# Altium PCB PCI short card universal - 32 BIT.PCBDOC (part 2 of 4)
Units mm, origin at the board's own origin, x right, y up, seen from the top; angles counter-clockwise.
Board outline 174.62 x 106.68 mm, 4 copper layers (TopLayer, MidLayer2, MidLayer3, BottomLayer); 200 components, 306 nets, 1120 pads, 510 vias.
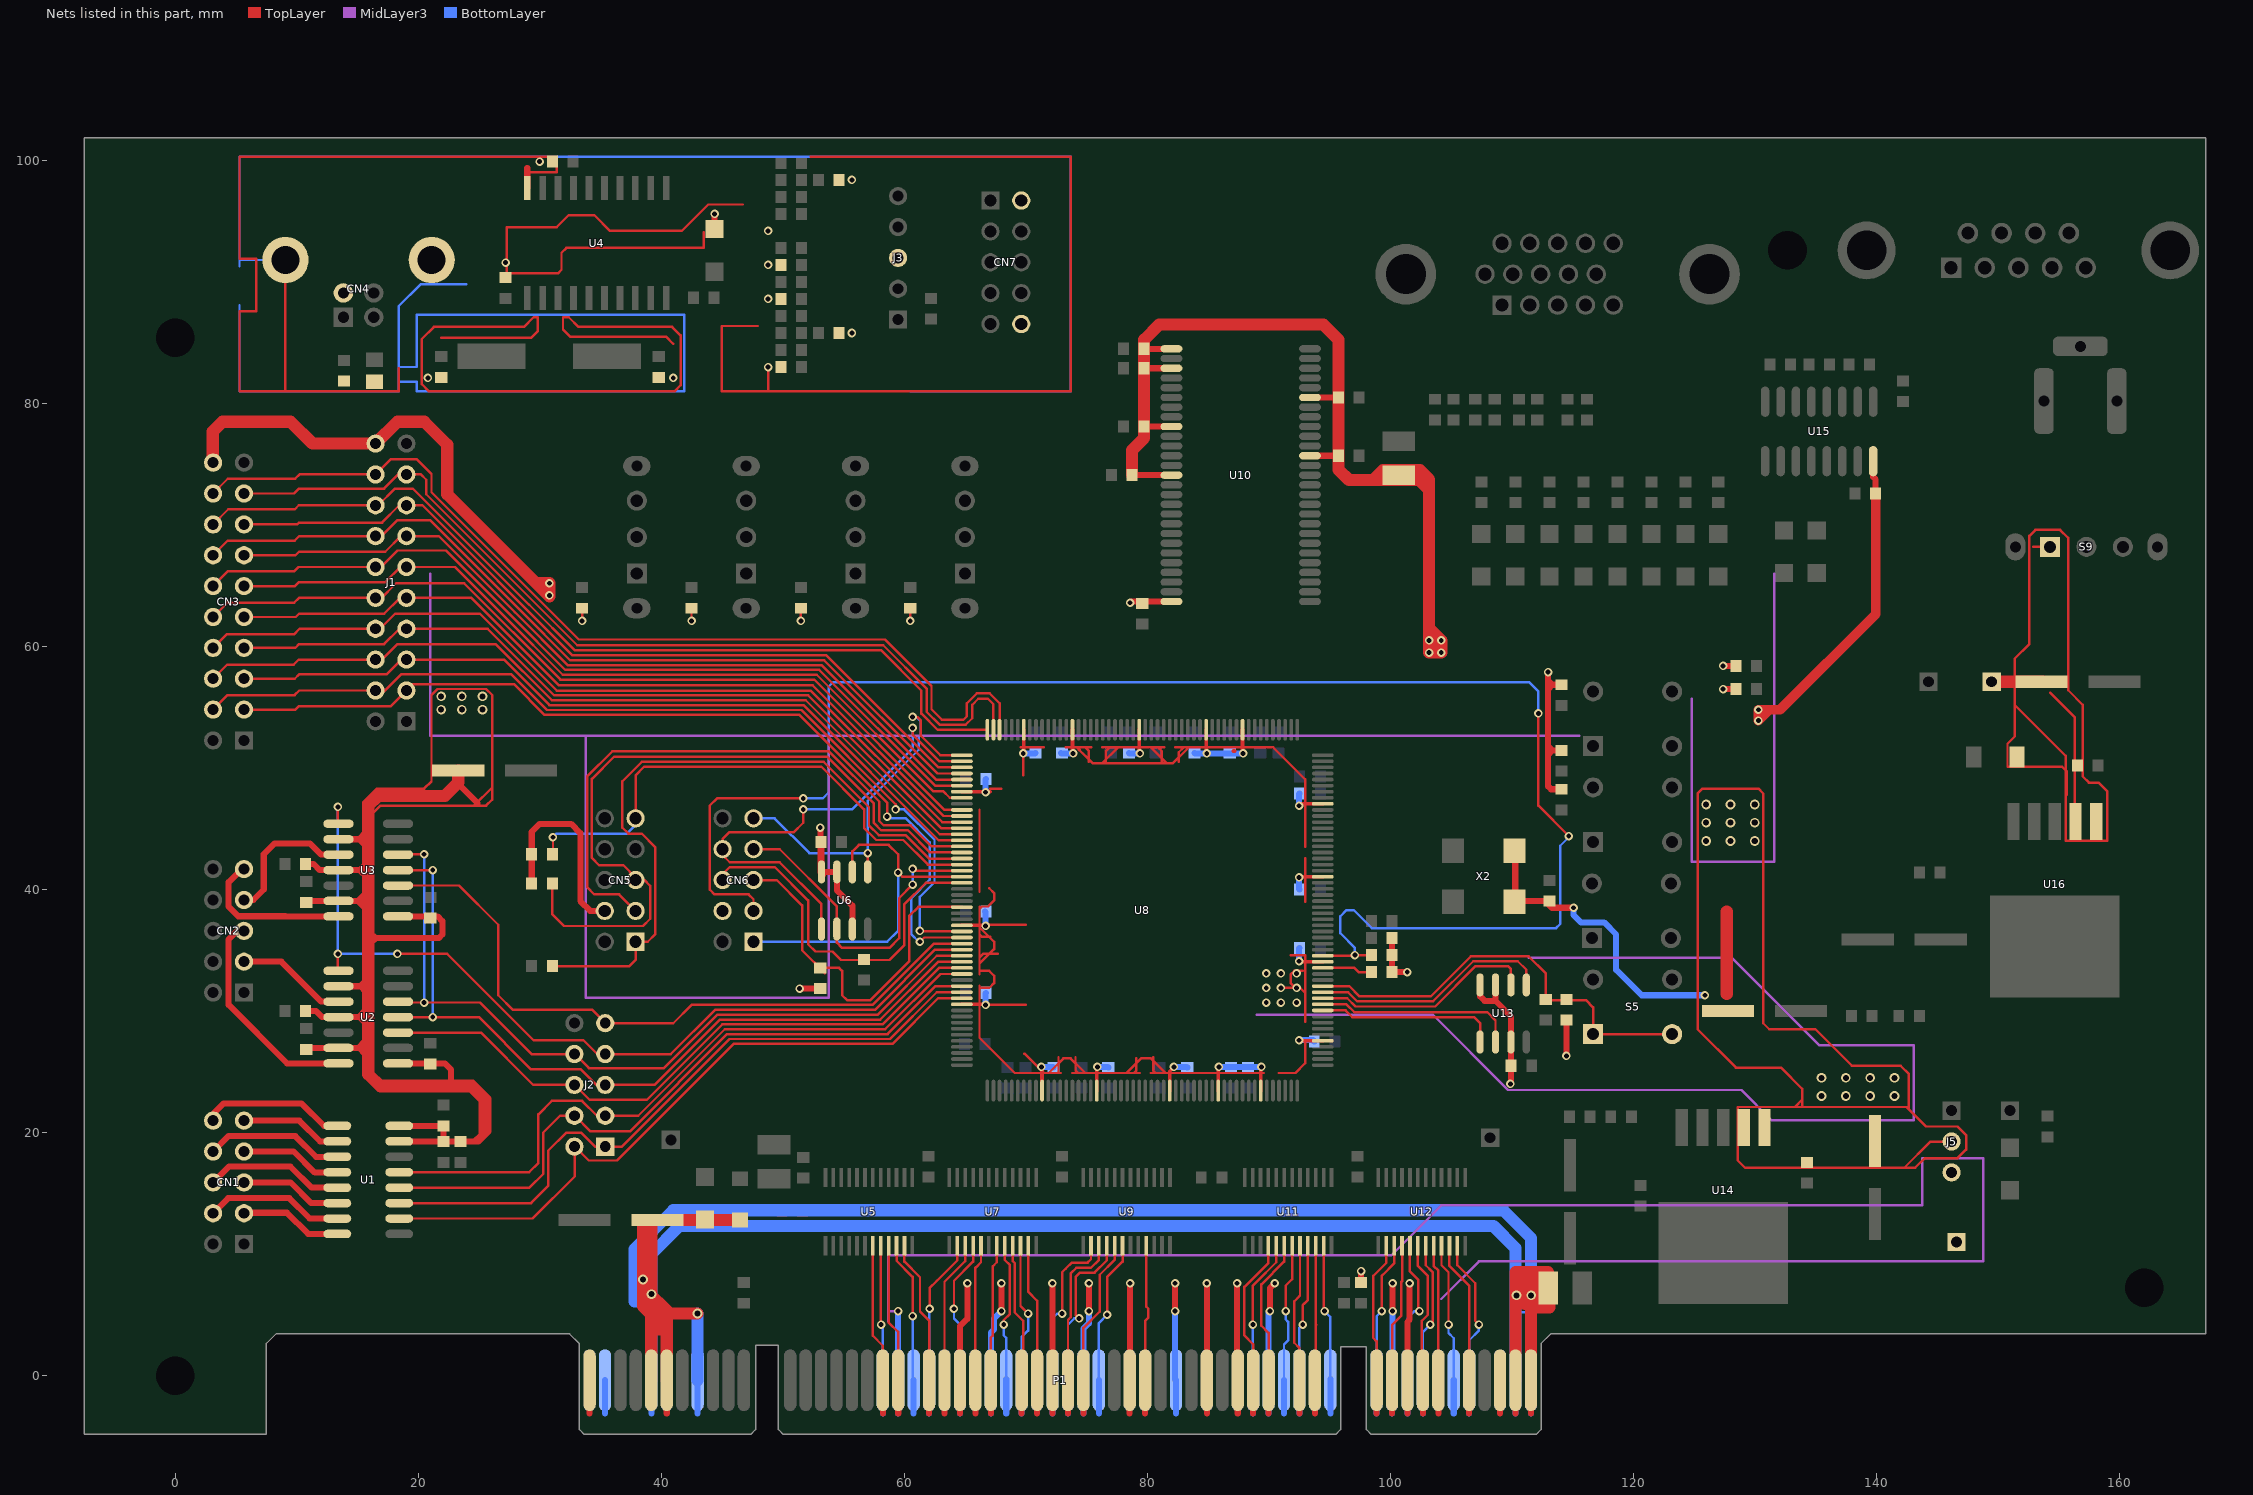
[diagram p4: the nets of this part, all layers, seen from the top]

## Via types
v1: diameter 0.7, hole 0.4, TopLayer to BottomLayer, 476 vias
v2: diameter 0.8, hole 0.5, TopLayer to BottomLayer, 34 vias

## Nets (pads, with @x,y where several pads share a name; then routed paths per layer and width w, separated by ;. In a path a pad name is that pad's centre, name@x,y a point inside that pad or via, vN(x,y) a via of type N, cw(c..) or ccw(c..) an arc to the next point about the centre after c; other vN are vias at no path point) (continued)
3_3V: C1.2 C2.2 C3.2 C4.2 C7.2 C8.2 C9.2 C10.2 C11.2 C12.1 C18.2 C21.2 C22.2 C23.2 C24.2 C25.2 C28.2 C29.2 C30.2 C32.2 C34.2 C36.1 C38.2 C40.1 C43.2 C49.2 C50.2 C51.2 C54.2 C55.2 C56.2 C58.2 C60.2 C63.2 C64.2 C65.2 C66.2 C67.2 C70.2 C71.2 C72.2 C74.2 CN3.20 CN5.4 CN6.4 J1.20 J5.2 R2.1 R3.1 R4.1 R5.1 R12.1 R20.1 R24.1 R28.1 R29.1 R30.1 R41.1 R42.1 R43.1 R46.1 R54.1 R55.1 U1.15 U1.16 U2.1 U2.9 U2.11 U2.13 U3.1 U3.9 U3.11 U3.13 U6.3 U6.7 U6.8 U8.7 U8.29 U8.42 U8.62 U8.71 U8.83 U8.91 U8.98 U8.109 U8.122 U8.136 U8.148 U8.166 U8.172 U8.183 U8.194 U8.202 U10.1 U10.3 U10.9 U10.14 U10.27 U10.43 U10.49 U13.3 U13.7 U13.8 U14.1 U14.2 U15.16 X2.1 X2.4 | length 1070
  TopLayer w0.2: 15.5,45.1 15.5,47.2 16.6,48.3 20.5,48.3 21.1,48.9 21.1,56 21.6,56.5 25.6,56.5 26.1,56 26.1,47.4 25.6,46.9 16.9,46.9 16.1,46.1 ; 24.6,46.9 26.1,48.4 ; v1(33.5,62.1) R4.1@33.5,63.15 ; v1(42.5,62.1) R5.1@42.5,63.15 ; v1(51.5,62.1) R12.1@51.5,63.15 ; v1(60.5,62.1) R24.1@60.5,63.15 ; 66.2,31.8 66.3,31.9 67,31.9 67.4,32.3 67.4,32.9 67,33.3 66.3,33.3 66.2,33.4 ; 66.2,32.1 66.2,27.8 69.1,24.9 72.9,24.9 ; 66.2,33.015 66.2,38.6 ; 66.2,33.9 67.4,35.1 67.4,35.7 66.2,36.9 ; 66.2,34.4 66.5,34.7 67.7,34.7 ; 66.2,36.3 66.4,36.1 67.1,36.1 ; 66.2,38.4 66.403,38.603 66.903,38.603 67.4,39.1 67.4,39.7 67,40.1 ; 66.2,39.815 66.2,46.585 ; v1(66.7,30.5) 70,30.5 ; v1(66.7,37) 66.8,37.1 70,37.1 ; 67.087,48.3 68,48.3 ; 69.585,51.7 71.485,51.7 ; 69.8,49.4 v1(69.8,51.2) ; 69.9,26.5 71.5,24.9 ; 71.9,24.9 73.1,26.1 73.7,26.1 74.9,24.9 ; 72.6,24.9 72.7,25 72.7,26.2 ; 73.3,51.7 75.4,51.7 ; 73.815,24.9 79.385,24.9 ; v1(73.9,51.2) v1@74.1,51 ; 74.1,26.2 74.1,25.1 74.3,24.9 ; 74.2,51.7 75.5,50.4 ; 74.723,51.177 75.5,50.4 ; 74.9,51.7 75.2,51.4 75.2,50.5 ; 76.3,50.4 77.6,51.7 ; 76.315,51.7 81.4,51.7 ; 76.6,50.4 76.6,51.4 76.9,51.7 ; 78.3,24.9 79.5,26.1 80.3,26.1 81.5,24.9 ; 78.9,24.9 79.1,25.1 79.1,26.1 ; 80.3,24.9 89.615,24.9 ; 80.3,51.7 81.6,50.4 ; 80.5,26.2 80.5,25.1 80.7,24.9 ; 80.9,51.7 81.2,51.4 81.2,50.4 ; 82.315,51.7 90.375,51.7 93,49.075 93,43.5 ; 82.6,50.5 82.6,51.3 83,51.7 ; 83.425,51.7 82.125,50.4 75.5,50.4 ; 90.815,24.9 92.2,24.9 93,25.7 93,27.564 ; v1(91,31.9) 92.6,31.9 93,31.5 ; 91.8,34.6 93,34.6 93,29.115 ; v1@92.2,31.9 91.8,32.3 91.8,33 92.1,33.3 92.8,33.3 ; 93,39 93,42.585 ; 133.3,22.1 133.9,22.7 ; 133.9,22.1 133.9,23.6 132.151,25.349 128.451,25.349 125.3,28.5 125.3,47.9 125.7,48.3 130.3,48.3 130.7,47.9 130.7,29 131.2,28.5 135,28.5 138,25.5 142,25.5 142.688,24.812 142.688,21.912 ; 142.3,17.1 144.46,19.26 J5.2@146.2,19.26 ; 128.6,17.7 128.6,22.1 142.5,22.1 144.1,20.5 146.7,20.5 147.4,19.8 147.4,18.6 146.7,17.9 144,17.9 143.2,17.1 129.2,17.1 128.6,17.7
  TopLayer w0.3: U8.42@64.7,30.55 66.65,30.55 v1(66.7,30.5) ; U8.29@64.7,37.05 66.65,37.05 v1(66.7,37) ; U8.7@64.75,48.05 67.1,48.05 ; v1(69.8,51.2) 69.85,51.25 U8.202@69.85,53.2 ; v1(71.3,25.4) 71.35,25.35 U8.62@71.35,23.4 ; U8.194@73.85,53.2 73.85,51.25 v1(73.9,51.2) ; U8.71@75.85,23.4 75.85,25.35 v1(75.9,25.4) ; U8.183@79.35,53.2 79.35,51.25 v1(79.4,51.2) ; U8.83@81.85,23.4 81.85,25.05 v1(82.2,25.4) ; U8.172@84.85,53.2 84.85,51.25 v1(84.9,51.2) ; U8.91@85.85,23.4 85.85,25.35 v1(85.9,25.4) ; 87.1,51.4 87.2,51.4 ; U8.166@87.85,53.2 87.85,51.25 v1(87.9,51.2) ; U8.98@89.35,23.4 89.35,25.35 v1(89.4,25.4) ; v1(92.5,27.6) 92.55,27.55 U8.109@94.5,27.55 ; v1(92.5,34.1) 92.55,34.05 U8.122@94.5,34.05 ; v1(92.5,41) 92.55,41.05 U8.136@94.5,41.05 ; v1(92.5,46.9) 92.65,47.05 U8.148@94.5,47.05
  TopLayer w0.5: C2.2@10.75,30 11.6,30 12.1,29.5 15.8,29.5 ; C4.2@10.75,42.1 11.4,42.1 11.9,41.6 15.7,41.6 ; C1.2@10.8,26.85 10.91,26.96 15.86,26.96 ; C3.2@10.84,39.06 15.74,39.06 ; U2.9@13.45,32.04 15.84,32.04 ; U3.9@13.45,44.14 15.84,44.14 ; 15.04,39.06 15.6,38.5 ; 15.06,26.96 15.6,27.5 ; 15.06,39.06 15.5,39.5 ; 15.1,29.5 15.7,30.1 ; 15.14,26.96 15.6,26.5 ; 15.14,44.14 15.7,44.7 ; 15.16,44.14 15.7,43.6 ; 15.2,29.5 15.7,29 ; 15.24,32.04 15.7,32.5 ; 15.26,32.04 15.7,31.6 ; 15.8,41 15.2,41.6 15.8,42.2 ; 16,36.5 16.5,36 ; 16.1,35.6 16.5,36 ; 16.8,24.1 24.5,24.1 25.8,22.8 25.8,20.1 24.975,19.275 U1.15@18.45,19.275 ; U2.1@18.35,25.69 22.21,25.69 22.7,25.2 22.7,23.8 ; U3.1@18.35,37.79 21.61,37.79 22,37.4 22,36.3 21.7,36 16.5,36 ; U1.16@18.45,20.545 22.095,20.545 C11.2@22.1,20.55 ; C10.2@22.1,19.25 C11.2@22.1,20.54 ; 23.3,49.2 23.3,48.7 24.9,47.1 ; C9.2@23.475,19.275 C9.2@23.5,19.25 ; 24.675,19.275 25.2,19.8 25.2,23 ; 24.775,19.275 25.5,20 ; R2.1@29.35,40.5 29.35,44.75 30,45.4 32.6,45.4 33.357,44.643 33.357,39.043 34.16,38.24 CN5.4@35.36,38.24 ; v1(51.4,31.85) R20.1@53.1,31.85 ; v1(53.1,45.1) 53.1,41.4 U6.8@53.3,41.2 ; C18.2@53.2,43.8 53.2,41.455 U6.8@53.195,41.45 U6.7@54.465,41.45 54.465,39.935 55.735,38.665 U6.3@55.735,36.75 ; v1(78.6,63.6) 78.7,63.7 U10.27@82,63.7 ; C24.2@78.75,74.1 U10.14@82,74.1 ; C25.2@79.75,78.1 U10.9@82,78.1 ; C22.2@79.75,82.9 U10.3@82,82.9 ; C21.2@79.75,84.5 U10.1@82,84.5 ; U10.43@93.4,75.7 C28.2@95.75,75.7 ; U10.49@93.4,80.5 C29.2@95.75,80.5 ; R30.1@100.15,36 R28.1@100.15,33.2 v1(101.4,33.2) ; U13.8@107.395,32.15 107.395,31.205 107.765,30.835 108.665,30.835 ; U13.7@108.665,32.15 108.665,30.835 ; v1(109.9,24) 109.935,24.035 109.935,29.565 108.665,30.835 ; X2.1@110.29,43.15 110.29,39.05 C34.2@113.1,39.05 ; C34.2@112.9,38.9 113.3,38.5 v1(115.1,38.5) ; 113,51.1 113.35,51.45 ; 113,51.8 113.35,51.45 ; 113,56.5 113.35,56.85 ; 113,57.2 113.35,56.85 ; v1(113,57.9) 113,48.5 113.25,48.25 R41.1@114.1,48.25 ; C34.2@113.1,38.8 113.4,38.5 ; R42.1@114.1,51.45 113.35,51.45 ; R43.1@114.1,56.85 113.35,56.85 ; v1(114.5,26.3) R46.1@114.5,29.25 ; v1(127.4,56.5) R54.1@128.45,56.5 ; v1(127.4,58.4) R55.1@128.45,58.4 ; U15.16@139.745,75.25 139.745,73.955 139.95,73.75 C43.2@139.95,72.6
  TopLayer w0.8: 131.2,54.8 v1(130.3,53.9) v1(130.3,54.8) 132.1,54.8 139.95,62.65 C43.2@139.95,72.6
  TopLayer w1: CN3.20@3.13,75.13 3.1,75.16 3.1,77.7 3.9,78.5 9.5,78.5 11.3,76.7 J1.20@16.5,76.7 18.3,78.5 20.5,78.5 22.4,76.6 22.4,72.531 v1@30.8,64.131 ; C12.1@23.3,49.8 23.3,48.8 22.2,47.7 16.7,47.7 15.9,46.9 15.9,24.8 16.9,23.8 24.4,23.8 25.5,22.7 25.5,20.6 ; 29.731,65.2 v1(30.8,65.2) v1(30.8,64.2) ; C24.2@78.75,74.1 78.75,76.15 79.75,77.15 79.75,85.25 81,86.5 94.5,86.5 95.75,85.25 95.75,74.55 96.6,73.7 103.2,73.7 ; 98.6,73.7 99.4,74.5 102.45,74.5 103.2,73.75 ; 102.4,73.7 103.2,72.9 ; v1(103.2,60.5) v1(104.2,60.5) ; 103.2,61.5 v1(104.2,60.5) ; 103.2,73.5 v1(103.2,59.5) v1(104.2,59.5) v1(104.2,60.5) ; 127.7,31.4 127.7,38.2
  MidLayer3 w0.2: 21,66 21,52.65 115.575,52.65 ; 33.8,52.65 33.8,31.1 53.8,31.1 53.8,52.65 ; 89,29.7 103.5,29.7 109.7,23.5 128.9,23.5 131.4,21 143.1,21 143.1,27.2 135.3,27.2 128.1,34.4 111.4,34.4 ; 124.8,55.7 124.8,42.3 131.6,42.3 131.6,66
  BottomLayer w0.5: C50.2@66.65,38.2 66.7,38.15 v1(66.7,37) ; v1(66.7,30.5) 66.7,31.45 C49.2@66.75,31.5 ; v1(66.7,48) 66.7,49.05 C51.2@66.75,49.1 ; v1(69.8,51.2) 70.75,51.2 C54.2@70.8,51.25 ; v1(71.3,25.4) 72.25,25.4 C55.2@72.3,25.35 ; C56.2@72.9,51.25 72.95,51.2 v1(73.9,51.2) ; v1(75.9,25.4) 76.75,25.4 C58.2@76.8,25.35 ; C60.2@78.5,51.25 78.55,51.2 v1(79.4,51.2) ; v1(82.2,25.4) 83.25,25.4 C63.2@83.3,25.35 ; C64.2@83.9,51.25 83.95,51.2 v1(87.9,51.2) ; v1(85.9,25.4) v1(89.4,25.4) ; v1(92.5,27.6) 93.65,27.6 C70.2@93.75,27.5 ; v1(92.5,34.1) 92.5,35.15 C71.2@92.55,35.2 ; v1(92.5,41) 92.5,40.05 C72.2@92.55,40 ; v1(92.5,46.9) 92.5,47.85 C74.2@92.55,47.9 ; v1(115.1,38.5) 115.1,37.9 115.7,37.3 117.6,37.3 118.6,36.3 118.6,33.4 120.7,31.3 v1(125.9,31.3)
  other v1: 89.8,30.7 91,30.7 92.3,30.7 89.8,31.9 92.3,31.9 89.8,33.1 91,33.1 92.3,33.1
  other v2: 135.5,23 137.5,23 139.5,23 141.5,23 135.5,24.5 137.5,24.5 139.5,24.5 141.5,24.5 126,44 128,44 130,44 126,45.5 128,45.5 130,45.5 126,47 128,47 130,47 21.9,54.8 23.6,54.8 25.3,54.8 21.9,55.9 23.6,55.9 25.3,55.9
5_0V: C46.1 C47.2 D3.2 S9.1 TP6.1 U16.1 U16.2 | length 90.5
  TopLayer w0.2: 151.4,55.2 155.6,51 155.6,44 159,44 159,48.1 158.3,48.8 157.5,48.8 157,49.3 157,55.2 155.8,56.4 155.8,68.934 155.134,69.6 153.1,69.6 152.6,69.1 152.6,60.2 151.4,59 151.4,52.6 150.8,52 150.8,50.1 155.3,50.1 155.7,49.7 155.7,47.8 ; 152.9,68.2 S9.1@154.3,68.2 ; 154.3,56.2 156.35,54.15 U16.2@156.35,45.65
  TopLayer w1: TP6.1@149.5,57.1 C46.1@153.7,57.1
5V: C75.1 C76.2 D1.1 D2.1 P1.A5 P1.A8 P1.A61 P1.A62 P1.B5 P1.B6 P1.B61 P1.B62 | length 283.4
  TopLayer w0.5: 40.462,-3.131 P1.B6@40.462,-0.2 ; 110.312,-3.131 P1.B61@110.312,-0.381 ; 111.582,-3.131 P1.B62@111.582,-0.381
  TopLayer w1: C75.1@38.5,12.7 38.5,5.7 40.462,3.738 ; 38.728,7.072 40.69,5.11 ; P1.B5@39.192,0.992 v2@39.192,6.7 ; 39.192,3.8 40.462,3.8 ; 39.2,5.1 v2(43,5.1) ; 39.2,5.193 C75.1@39.2,12.6 ; C75.1@40.1,12.8 D2.1@46.5,12.8 ; P1.B6@40.462,-0.381 40.462,5.03 ; P1.B61@110.312,-0.381 110.312,8.5 113,8.5 111.2,8.5 ; 111.1,5.9 111.1,8 ; P1.B62@111.582,-0.381 v2@111.582,6.6 ; 111.582,5.628 113.1,5.628 C76.2@113.1,7.2 ; 112.1,6.5 112.1,8.3
  BottomLayer w0.2: 110.312,5.228 111.582,5.228
  BottomLayer w0.5: 39.192,-3.131 P1.A5@39.192,-0.381 ; 43.002,-3.131 P1.A8@43.002,-0.381 ; 110.312,-3.131 P1.A61@110.312,-0.381 ; 111.582,-3.131 P1.A62@111.582,-0.381
  BottomLayer w1: 38.992,6.1 37.8,6.1 37.8,10.4 41,13.6 109.3,13.6 111.6,11.3 v2(111.6,6.6) ; P1.A5@39.192,-0.381 39.192,9.992 41.5,12.3 108.5,12.3 110.312,10.488 P1.A61@110.312,-0.381 ; P1.A8@43,-0.379 P1.A8@43.002,-0.381 ; P1.A8@43,-0.373 v2(43,5.1) ; P1.A62@111.582,-0.381 v2@111.582,6.6
  other v2: 110.4,6.6 39.2,6.7 38.5,7.9
+3.3V: J5.3 P1.A21 P1.A27 P1.A33 P1.A39 P1.A45 P1.A53 P1.B25 P1.B31 P1.B36 P1.B41 P1.B43 P1.B54 R27.1 TP4.1 | length 285
  TopLayer w0.5: 64.592,-3.131 64.592,4.059 65.2,4.667 v1(65.2,7.6) ; v1(68,5.3) v1(68,7.6) ; v1(72.2,7.6) 72.2,-0.369 P1.B31@72.212,-0.381 72.212,-3.131 ; v1(75.2,5.3) v1(75.2,7.6) ; 78.562,-3.131 P1.B36@78.562,-0.381 78.6,-0.343 v1(78.6,7.6) ; v1(82.3,5.3) v1(82.3,7.6) ; v1(84.9,7.6) 84.912,7.588 84.912,-3.131 ; v1(87.4,7.6) 87.4,-0.329 P1.B43@87.452,-0.381 87.452,-3.131 ; v1(90.1,5.3) 90.1,7.2 v1(90.5,7.6) ; R27.1@97.6,7.65 v1(97.6,8.6) ; v1(100.2,5.3) v1(100.2,7.6) ; 101.422,-3.131 101.422,4.422 101.6,4.6 v1(101.6,7.6)
  MidLayer3 w0.2: 58.7,4.45 58.7,9.9 100.1,9.9 104.2,14 143.8,14 143.8,17.9 148.8,17.9 148.8,9.4 107.3,9.4 104.2,6.3 ; 58.7,5.3 v1(59.5,5.3)
  BottomLayer w0.5: 59.5,-3.131 v1(59.5,5.3) ; P1.A21@59.5,-0.369 P1.A21@59.512,-0.381 ; 67.132,-3.131 67.132,3.532 67.4,3.8 67.4,4.7 v1(68,5.3) ; 74.752,-3.131 74.752,3.852 75.2,4.3 v1(75.2,5.3) ; v1(82.3,5.3) 82.3,-0.309 P1.A39@82.372,-0.381 82.372,-3.131 ; 89.992,-3.131 89.992,5.192 v1(90.1,5.3) ; 100.152,-3.131 P1.A53@100.152,-0.381 100.2,-0.333 v1(100.2,5.3)
+12V: P1.A2 | length 2.8
  BottomLayer w0.5: 35.382,-3.131 P1.A2@35.382,-0.381
-12V: P1.B1 | length 2.8
  TopLayer w0.5: 34.112,-3.131 P1.B1@34.112,-0.381
ACK64#: P1.B60 | length 2.8
  TopLayer w0.5: 109.042,-3.131 P1.B60@109.042,-0.381
AD00: P1.A58 U12.11 | length 15.1
  TopLayer w0.2: U12.11@105.525,10.7 105.525,9.075 107,7.6 107,4.5 v1(107.3,4.2)
  BottomLayer w0.2: P1.A58@106.502,-0.381 106.502,2.902 107.3,3.7 v1(107.3,4.2)
  BottomLayer w0.5: 106.502,-3.131 P1.A58@106.502,-0.2
AD01: P1.B58 U12.10 | length 14.5
  TopLayer w0.2: U12.10@104.875,10.7 104.875,9.025 106.5,7.4 P1.B58@106.5,-0.381
  TopLayer w0.5: 106.5,-3.131 P1.B58@106.5,-0.381
AD02: P1.A57 U12.9 | length 14.3
  TopLayer w0.2: U12.9@104.225,10.7 104.225,9.075 104.8,8.5 v1(104.8,4.2)
  BottomLayer w0.2: v1(104.8,4.2) 104.8,3.5 105.232,3.068 P1.A57@105.232,-0.381 P1.A57@105.2,-0.349
  BottomLayer w0.5: 105.232,-3.131 P1.A57@105.232,-0.381
AD03: P1.B56 U12.8 | length 14
  TopLayer w0.2: U12.8@103.575,10.7 103.575,9.025 103.962,8.638 P1.B56@103.962,-0.381
  TopLayer w0.5: 103.962,-3.131 P1.B56@103.962,-0.381
AD04: P1.A55 U12.7 | length 14.4
  TopLayer w0.2: U12.7@102.925,10.7 102.925,9.075 103.4,8.6 103.5,8.5 103.5,4.4 v1(103.3,4.2)
  BottomLayer w0.2: P1.A55@102.692,-0.381 102.692,3.592 v1(103.3,4.2)
  BottomLayer w0.5: 102.692,-3.131 P1.A55@102.692,-0.381
AD05: P1.B55 U12.6 | length 14.4
  TopLayer w0.2: U12.6@102.275,10.7 102.275,9.025 102.7,8.6 103.1,8.2 103.1,5 102.6,4.5 102.6,-0.289 P1.B55@102.692,-0.381
  TopLayer w0.5: 102.692,-3.131 P1.B55@102.692,-0.381
AD06: P1.A54 U12.5 | length 14.8
  TopLayer w0.2: U12.5@101.625,10.7 101.625,8.575 102.3,7.9 102.3,5.4 v1(102.4,5.3)
  BottomLayer w0.2: P1.A54@101.422,-0.381 101.422,4.722 102,5.3 v1(102.4,5.3)
  BottomLayer w0.5: 101.422,-3.131 P1.A54@101.422,-0.381
AD07: P1.B53 U12.4 | length 14.2
  TopLayer w0.2: P1.B53@100.152,-0.381 100.152,4.152 100.9,4.9 100.9,7.704 100.975,7.779 U12.4@100.975,10.7
  TopLayer w0.5: 100.152,-3.131 P1.B53@100.152,-0.381
AD08: P1.B52 U12.2 | length 14.4
  TopLayer w0.2: P1.B52@98.882,-0.381 98.882,2.818 98.6,3.1 98.6,4.9 98.6,8.2 99.675,9.275 U12.2@99.675,10.7
  TopLayer w0.5: 98.882,-3.131 P1.B52@98.882,-0.381
AD09: P1.A49 U11.11 | length 14.1
  TopLayer w0.2: U11.11@94.525,10.7 94.525,8.575 94.525,5.375 v1(94.6,5.3)
  BottomLayer w0.2: v1(94.6,5.3) 95.072,4.828 95.072,4.528 P1.A49@95.072,-0.381
  BottomLayer w0.5: 95.072,-3.131 P1.A49@95.072,-0.3
AD10: P1.B48 U11.10 | length 14.2
  TopLayer w0.2: P1.B48@93.802,-0.381 93.875,-0.308 93.875,4.5 ; 93.85,4.25 93.9,4.2 ; 93.875,4.225 U11.10@93.875,10.7
  TopLayer w0.5: 93.802,-3.131 P1.B48@93.802,-0.381
AD11: P1.A47 U11.9 | length 14.1
  TopLayer w0.2: v1(92.8,4.2) 92.8,5.8 92.9,5.9 93.225,6.225 U11.9@93.225,10.7
  BottomLayer w0.2: P1.A47@92.532,-0.381 92.532,3.932 v1(92.8,4.2)
  BottomLayer w0.5: 92.532,-3.131 P1.A47@92.532,-0.381
AD12: P1.B47 U11.8 | length 14.2
  TopLayer w0.2: P1.B47@92.532,-0.381 92.532,2.268 92.1,2.7 92.1,6.1 92.4,6.4 92.575,6.575 U11.8@92.575,10.7
  TopLayer w0.5: 92.532,-3.131 P1.B47@92.532,-0.381
AD13: P1.A46 U11.7 | length 14.3
  TopLayer w0.2: v1@91.407,5.3 91.407,7.407 91.925,7.925 U11.7@91.925,10.7
  BottomLayer w0.2: P1.A46@91.262,-0.381 91.262,2.562 91.6,2.9 91.6,4.415 91.4,4.615 v1(91.4,5.3)
  BottomLayer w0.5: 91.262,-3.131 P1.A46@91.262,-0.381
AD14: P1.B45 U11.6 | length 14.9
  TopLayer w0.2: P1.B45@89.992,-0.381 89.992,3.508 89.4,4.1 89.4,7.5 91.275,9.375 U11.6@91.275,10.7
  TopLayer w0.5: 89.992,-3.131 P1.B45@89.992,-0.381
AD15: P1.A44 U11.5 | length 14.7
  TopLayer w0.2: v1(88.7,4.2) 88.7,7.4 89.003,7.703 90.625,9.325 U11.5@90.625,10.7
  BottomLayer w0.2: v1(88.7,4.2) 88.7,-0.359 P1.A44@88.722,-0.381
  BottomLayer w0.5: 88.7,-3.131 P1.A44@88.7,-0.3
AD16: P1.A32 U9.4 | length 16.3
  TopLayer w0.2: v1(74.4,4.7) 74.107,4.993 74.107,8.107 74.474,8.474 75.674,8.474 76.675,9.475 U9.4@76.675,10.7
  BottomLayer w0.2: P1.A32@73.482,-0.381 73.482,4.182 74,4.7 v1(74.4,4.7)
  BottomLayer w0.5: 73.482,-3.131 P1.A32@73.482,-0.381
AD17: P1.B32 U9.3 | length 15.6
  TopLayer w0.2: P1.B32@73.482,-0.381 73.482,4.582 73.7,4.8 73.7,8.4 74.174,8.874 75.374,8.874 76.025,9.525 U9.3@76.025,10.7
  TopLayer w0.5: 73.482,-3.131 P1.B32@73.482,-0.381
AD18: P1.A31 U9.2 | length 16.2
  TopLayer w0.2: v1(73,5.1) 73,8.5 73.3,8.8 73.8,9.3 75.1,9.3 75.375,9.575 U9.2@75.375,10.7
  BottomLayer w0.2: P1.A31@72.212,-0.381 72.212,4.712 72.6,5.1 v1(73,5.1)
  BottomLayer w0.5: 72.212,-3.131 P1.A31@72.212,-0.3
AD19: P1.B30 U7.11 | length 14.1
  TopLayer w0.2: U7.11@70.225,10.7 70.225,6.875 70.942,6.158 P1.B30@70.942,-0.381
  TopLayer w0.5: 70.942,-3.131 P1.B30@70.942,-0.381
AD20: P1.A29 U7.10 | length 14.3
  TopLayer w0.2: U7.10@69.575,10.7 69.575,5.725 v1(70.2,5.1)
  BottomLayer w0.2: P1.A29@69.672,-0.381 69.672,3.172 70.2,3.7 v1(70.2,5.1)
  BottomLayer w0.5: 69.672,-3.131 P1.A29@69.672,-0.381
AD21: P1.B29 U7.9 | length 14.2
  TopLayer w0.2: U7.9@68.925,10.7 68.925,9.441 69.107,9.259 69.107,5.293 69.107,5.193 69.8,4.5 69.8,-0.253 P1.B29@69.672,-0.381
  TopLayer w0.5: 69.672,-3.131 P1.B29@69.672,-0.381
AD22: P1.A28 U7.8 | length 14.4
  TopLayer w0.2: v1(68.2,4.2) 68.2,4.567 68.7,5.067 68.7,9.1 68.275,9.525 U7.8@68.275,10.7
  BottomLayer w0.2: v1(68.2,4.2) 68.2,3.3 68.402,3.098 P1.A28@68.402,-0.381
  BottomLayer w0.5: 68.402,-3.131 P1.A28@68.402,-0.3
AD23: P1.B27 U7.7 | length 14
  TopLayer w0.2: P1.B27@67.132,-0.381 67.132,3.132 67.3,3.3 67.3,4.2 67.3,9 67.625,9.325 U7.7@67.625,10.7
  TopLayer w0.5: 67.132,-3.131 P1.B27@67.132,-0.381
AD24: P1.A25 U7.4 | length 14.7
  TopLayer w0.2: v1(64.1,5.5) 64.1,7.8 65.675,9.375 U7.4@65.675,10.7
  BottomLayer w0.2: v1(64.1,5.5) 64.1,4.7 64.592,4.208 P1.A25@64.592,-0.381
  BottomLayer w0.5: 64.592,-3.131 P1.A25@64.592,-0.381
AD25: P1.B24 U7.3 | length 14.5
  TopLayer w0.2: P1.B24@63.322,-0.381 63.322,7.722 64.1,8.5 65.025,9.425 U7.3@65.025,10.7
  TopLayer w0.5: 63.322,-3.131 P1.B24@63.322,-0.381
AD26: P1.A23 U7.2 | length 14.8
  TopLayer w0.2: v1(62.1,5.5) 62.1,7.2 62.7,7.8 64.375,9.475 U7.2@64.375,10.7
  BottomLayer w0.2: P1.A23@62.052,-0.381 62.052,5.452 v1(62.1,5.5)
  BottomLayer w0.5: 62.052,-3.131 P1.A23@62.052,-0.381
AD27: P1.B23 U5.11 | length 14.7
  TopLayer w0.2: U5.11@60.025,10.7 60.025,9.375 61.307,8.093 61.307,5.274 62.052,4.529 P1.B23@62.052,-0.381
  TopLayer w0.5: 62.052,-3.131 P1.B23@62.052,-0.381
AD28: P1.A22 U5.10 | length 14.4
  TopLayer w0.2: U5.10@59.375,10.7 59.375,9.45 60.7,8.125 v1(60.7,4.9)
  BottomLayer w0.2: v1(60.7,4.9) 60.7,-0.299 P1.A22@60.782,-0.381
  BottomLayer w0.5: 60.782,-3.131 P1.A22@60.782,-0.381
AD29: P1.B21 U5.9 | length 14.2
  TopLayer w0.2: U5.9@58.725,10.7 58.725,5.5 58.725,4.379 59.512,3.591 P1.B21@59.512,-0.381
  TopLayer w0.5: 59.512,-3.131 P1.B21@59.512,-0.381
AD30: P1.A20 U5.8 | length 13.9
  TopLayer w0.2: U5.8@58.075,10.7 v1@58.075,4.225 ; v1@58.075,4.225 v1(58.1,4.2) v1@58.075,4.225
  BottomLayer w0.2: v1(58.1,4.2) 58.242,4.058 P1.A20@58.242,-0.381
  BottomLayer w0.5: 58.242,-3.131 P1.A20@58.242,-0.381
AD31: P1.B20 U5.7 | length 14.2
  TopLayer w0.2: U5.7@57.425,10.7 57.425,3.275 58.242,2.458 P1.B20@58.242,-0.381
  TopLayer w0.5: 58.242,-3.131 P1.B20@58.242,-0.381
ADC_CH1: CN1.10 U1.1 | length 11.9
  TopLayer w0.5: CN1.10@3.13,20.98 3.13,21.53 4,22.4 10.4,22.4 12.255,20.545 U1.1@13.35,20.545
ADC_CH2: CN1.9 U1.2 | length 8.4
  TopLayer w0.5: CN1.9@5.67,20.98 10.22,20.98 11.925,19.275 U1.2@13.35,19.275
ADC_CH3: CN1.8 U1.3 | length 11.4
  TopLayer w0.5: CN1.8@3.13,18.44 4.39,19.7 9.9,19.7 11.595,18.005 U1.3@13.35,18.005
ADC_CH4: CN1.7 U1.4 | length 8.4
  TopLayer w0.5: CN1.7@5.67,18.44 9.76,18.44 11.5,16.7 13.315,16.7 U1.4@13.35,16.735
ADC_CH5: CN1.6 U1.5 | length 11.5
  TopLayer w0.5: CN1.6@3.13,15.9 4.43,17.2 9.5,17.2 11.235,15.465 U1.5@13.35,15.465
ADC_CH6: CN1.5 U1.6 | length 8.4
  TopLayer w0.5: CN1.5@5.67,15.9 9.5,15.9 11.205,14.195 U1.6@13.35,14.195
ADC_CH7: CN1.4 U1.7 | length 11.4
  TopLayer w0.5: CN1.4@3.13,13.36 4.37,14.6 9.4,14.6 11.075,12.925 U1.7@13.35,12.925
ADC_CH8: CN1.3 U1.8 | length 8.5
  TopLayer w0.5: CN1.3@5.6,13.4 9.2,13.4 10.945,11.655 U1.8@13.35,11.655
ADC_CLK: J2.3 U1.13 U8.37 | length 56.4
  TopLayer w0.2: U1.13@18.45,16.735 29.135,16.735 29.9,17.5 29.9,21.5 31,22.6 33.5,22.6 34.72,21.38 38.113,21.38 45.233,28.5 58.433,28.5 62.983,33.05 U8.37@64.75,33.05
ADC_CS: J2.2 U1.10 U8.41 | length 56.2
  TopLayer w0.2: U1.10@18.45,12.925 29.425,12.925 32.9,16.4 32.9,18.84 34.04,17.7 36.363,17.7 45.963,27.3 59.033,27.3 62.783,31.05 U8.41@64.75,31.05
ADC_DIN: J2.1 U1.11 U8.40 | length 56.1
  TopLayer w0.2: U1.11@18.45,14.195 29.295,14.195 30.7,15.6 30.7,18.5 32.2,20 33.4,20 34.56,18.84 36.773,18.84 45.633,27.7 58.833,27.7 62.683,31.55 U8.40@64.75,31.55
ADC_DOUT: J2.4 U1.12 U8.39 | length 56.2
  TopLayer w0.2: U1.12@18.45,15.465 29.165,15.465 30.3,16.6 30.3,20 31.68,21.38 32.9,21.38 34.18,20.1 37.433,20.1 45.433,28.1 58.633,28.1 62.583,32.05 U8.39@64.75,32.05
C/BE#0: P1.A52 U12.3 | length 14.4
  TopLayer w0.2: v1(99.3,5.3) 99.3,8.2 99.4,8.3 100.325,9.225 U12.3@100.325,10.7
  BottomLayer w0.2: P1.A52@98.882,-0.381 98.882,4.882 v1(99.3,5.3)
  BottomLayer w0.5: 98.882,-3.131 P1.A52@98.882,-0.381
C/BE#1: P1.B44 U11.4 | length 14.9
  TopLayer w0.2: P1.B44@88.722,-0.381 88.722,2.578 88,3.3 88,7.3 89.975,9.275 U11.4@89.975,10.7
  TopLayer w0.5: 88.722,-3.131 P1.B44@88.722,-0.381
C/BE#2: P1.B33 U9.5 | length 14.9
  TopLayer w0.2: P1.B33@74.752,-0.381 74.752,3.919 76.1,5.267 76.1,8.3 77.325,9.525 U9.5@77.325,10.7
  TopLayer w0.5: 74.752,-3.131 P1.B33@74.752,-0.381
C/BE#3: P1.B26 U7.5 | length 14.6
  TopLayer w0.2: P1.B26@65.862,-0.381 65.862,8.862 66.325,9.325 ; 65.9,8.9 66.325,9.325 ; U7.5@66.325,10.7 66.325,9.325
  TopLayer w0.5: 65.862,-3.131 P1.B26@65.862,-0.381
CABLE_GND: C5.1 C6.1 C13.1 C14.1 C15.1 C16.1 CN4.4 CN4.5 CN4.6 CN7.2 CN7.10 J3.3 LED1.2 R8.2 R13.2 R15.2 R21.2 R22.2 U4.20 | length 480.7
  TopLayer w0.2: CN4.5@9.08,91.81 9.08,81.02 9.1,81 ; 18.4,82.907 18.4,81 5.304,81 5.304,87.596 6.696,87.596 6.696,91.904 5.304,91.904 5.304,100.309 31.409,100.309 31.409,99.012 29.112,99.012 ; 21.9,85.4 29.3,85.4 29.855,85.955 29.855,87.1 29.5,87.1 28.7,86.3 21.3,86.3 20.3,85.3 20.3,81.6 20.9,81 41.1,81 41.6,81.5 41.6,85.6 40.9,86.3 33.2,86.3 32.4,87.1 31.925,87.1 31.925,86.075 32.5,85.5 40.4,85.5 41,84.9 ; C14.1@27,90.3 C14.1@27.4,90.7 ; 43.5,94.1 43.5,92.8 32.2,92.8 31.8,92.4 31.8,91 31.5,90.7 27.3,90.7 27.3,94.5 31.4,94.5 32.4,95.5 34.5,95.5 35.8,94.2 41.7,94.2 43.874,96.374 46.705,96.374 ; 47.96,86.374 45,86.374 45,81 73.7,81 73.7,100.309 52.3,100.309 ; 48.8,81 v1(48.8,83)
  TopLayer w0.5: U4.20@28.985,97.721 28.985,99.385 ; LED1.2@44.4,94.35 v1(44.4,95.6)
  BottomLayer w0.2: 5.304,88.096 5.304,81.004 18.4,81.004 18.4,88 20.2,89.8 23.958,89.8 ; 5.304,91.304 5.304,100.309 73.7,100.309 73.7,81.009 60.487,81.009 ; 5.304,91.81 CN4.5@9.08,91.81 ; 18.4,81.8 19.9,81.8 19.9,81 41.9,81 41.9,87.3 19.9,87.3 19.9,83 18.4,83
  other v1: 20.8,82.1 41,82.1 55.7,85.8 48.8,88.6 48.8,91.4 27.2,91.6 48.8,94.2 55.7,98.4 30,99.9
CONF_ASDO: CN6.9 U6.5 U8.1 | length 32.6
  TopLayer w0.2: v1(57,43) 57,41.455 U6.5@57.055,41.4 ; v1(60.7,54.2) 61.1,54.2 61.375,53.925 61.375,52.656 62.981,51.05 U8.1@64.75,51.05
  BottomLayer w0.2: CN6.9@47.6,45.86 49.34,45.86 52.2,43 v1(57,43) 57,47.3 ; 57.681,47.981 57,47.3 ; v1@60.807,54.174 61.026,54.174 61.363,53.837 61.363,52.763 61.2,52.6 61.2,51.5 57,47.3
CONF_DATA: CN6.7 U6.2 U8.20 | length 27.7
  TopLayer w0.2: CN6.7@47.6,43.32 49.761,43.32 54.465,38.616 54.465,35.635 54.9,35.2 58.8,35.2 59.6,36 59.6,39.3 v1(60.7,40.4) ; v1(60.7,41.7) 60.85,41.55 U8.20@64.75,41.55
  BottomLayer w0.2: v1(60.7,40.4) v1(60.7,41.7)
CONF_DCLK: CN6.1 U6.6 U8.21 | length 30
  TopLayer w0.2: U6.6@55.735,41.45 55.735,43.135 56.274,43.674 58.726,43.674 59.5,42.9 v1(59.5,41.4) 59.85,41.05 U8.21@64.75,41.05
  BottomLayer w0.2: CN6.1@47.6,35.7 58.6,35.7 59.5,36.6 v1(59.5,41.4)
CONF_DONE: CN6.3 R29.2 U8.123 | length 136.9
  TopLayer w0.2: CN6.3@47.6,38.24 47.6,39.2 47.2,39.6 44.4,39.6 44.007,39.993 44.007,46.907 44.6,47.5 v1(51.7,47.5) ; U8.123@94.45,34.55 97.05,34.55 v1(97.1,34.6) R29.2@98.45,34.6 ; v1(112.2,54.5) 112.2,46.9 v1(114.7,44.4)
  BottomLayer w0.2: v1(51.7,47.5) 53.3,47.5 53.8,48 53.8,56.7 54.165,57.065 111.435,57.065 112.2,56.3 v1(112.2,54.5) ; v1(97.1,34.6) 97.1,35.2 95.9,36.4 95.9,37.8 96.4,38.3 97,38.3 98.481,36.819 113.652,36.819 114,37.167 114,43.6 114.7,44.3 v1(114.7,44.4)
CONF_NCE: CN6.6 R23.1 U8.22 | length 30.3
  TopLayer w0.2: CN6.6@45.06,40.78 45.06,41.26 45.65,41.85 49.35,41.85 52.1,39.1 52.1,35.5 52.7,34.9 54.1,34.9 54.8,34.2 58.8,34.2 60,35.4 60,38.767 61.783,40.55 U8.22@64.75,40.55
CONF_NCONFIG: CN6.5 R20.2 U8.26 | length 30.5
  TopLayer w0.2: CN6.5@47.6,40.78 49.52,40.78 51.6,38.7 51.6,35 R20.2@53.475,33.125 ; R20.2@53.1,33.55 54.65,33.55 54.9,33.3 54.9,31.3 55.3,30.9 57.233,30.9 60.407,34.074 60.407,37.807 61.174,38.574 64.726,38.574 U8.26@64.75,38.55
CONF_NCSO: CN6.8 U6.1 U8.2 | length 39.7
  TopLayer w0.2: v1(51.7,46.6) 51.7,45.5 50.9,44.7 45.6,44.7 45.06,44.16 45.06,42.84 45.65,42.25 49.75,42.25 53.195,38.805 U6.1@53.195,36.75 ; v1(60.7,53.3) 60.7,52.766 62.916,50.55 U8.2@64.75,50.55
  BottomLayer w0.2: v1(51.7,46.6) 55.7,46.6 60.7,51.6 v1(60.7,53.3)
CONF_NSTATUS: R28.2 U8.121 | length 4.1
  TopLayer w0.2: U8.121@94.45,33.55 97.05,33.55 97.4,33.2 R28.2@98.45,33.2
CONF_TCK: CN5.1 R1.1 U8.18 | length 57.6
  TopLayer w0.2: R1.1@31.05,33.7 37.4,33.7 37.9,34.2 CN5.1@37.9,35.7 38.9,35.7 39.507,36.307 39.507,43.493 38.4,44.6 37.3,44.6 36.8,45.1 36.8,48.9 38.4,50.5 53.381,50.5 57.107,46.774 57.107,45.274 57.907,44.474 60.126,44.474 62.05,42.55 U8.18@64.75,42.55
CONF_TDI: CN5.9 R3.2 U8.19 | length 44.1
  TopLayer w0.2: R3.2@31.05,42.9 31.1,42.95 v1(31.1,44.3) ; CN5.9@37.9,45.86 37.9,49.396 38.604,50.1 53.2,50.1 56.707,46.593 56.707,45.074 57.707,44.074 59.926,44.074 61.95,42.05 U8.19@64.75,42.05
  BottomLayer w0.2: v1(31.1,44.3) 31.4,44.6 37.2,44.6 37.9,45.3 CN5.9@37.9,45.86
CONF_TDO: CN5.3 U8.16 | length 49.8
  TopLayer w0.2: CN5.3@37.9,38.24 36.54,39.6 34.5,39.6 33.907,40.193 33.907,49.307 35.974,51.374 53.81,51.374 57.95,47.234 57.95,45.65 58.326,45.274 60.526,45.274 62.25,43.55 U8.16@64.75,43.55
CONF_TMS: CN5.5 R2.2 U8.17 | length 61.5
  TopLayer w0.2: R2.2@31.05,40.5 31.05,37.95 32,37 38.5,37 39.1,37.6 39.1,40.3 38.62,40.78 CN5.5@37.9,40.78 ; CN5.5@37.9,41 36.9,42 34.9,42 34.307,42.593 34.307,49.107 36.137,50.937 53.663,50.937 57.507,47.093 57.507,45.474 58.107,44.874 60.307,44.874 62.131,43.05 U8.17@64.75,43.05
DAC_CH1: CN2.9 U3.14 | length 13.1
  TopLayer w0.5: CN2.9@5.67,41.68 5.48,41.68 4.4,40.6 4.4,38.6 5.2,37.8 9.1,37.8 9.11,37.79 U3.14@13.45,37.79
DAC_CH2: CN2.7 U3.10 | length 11.8
  TopLayer w0.5: CN2.7@5.67,39.14 6.44,39.14 7.3,40 7.3,42.9 8.2,43.8 11.1,43.8 12.03,42.87 U3.10@13.45,42.87
DAC_CH3: CN2.5 U2.14 | length 18
  TopLayer w0.5: CN2.5@5.67,36.6 5.1,36.6 4.4,35.9 4.4,30.5 9.21,25.69 U2.14@13.45,25.69
DAC_CH4: CN2.3 U2.10 | length 9.1
  TopLayer w0.5: CN2.3@5.67,34.06 8.74,34.06 12.03,30.77 U2.10@13.45,30.77
DAC_CLK: J2.5 U2.4 U3.4 U8.35 | length 67.9
  TopLayer w0.2: U2.4@18.35,29.5 25,29.5 29.3,25.2 33.4,25.2 34.68,23.92 39.453,23.92 44.833,29.3 58.033,29.3 62.783,34.05 U8.35@64.75,34.05 ; U3.4@18.35,41.6 v1(21.2,41.6)
  BottomLayer w0.2: v1(21.2,29.5) v1(21.2,41.6)
DAC_CS1: J2.9 U3.3 U8.32 | length 57.2
  TopLayer w0.2: U3.3@18.35,40.33 23.37,40.33 26.6,37.1 26.6,31.3 27.8,30.1 34.34,30.1 35.44,29 41,29 42.5,30.5 57.4,30.5 62.45,35.55 U8.32@64.75,35.55
DAC_CS2: J2.6 U2.3 U8.36 | length 53.3
  TopLayer w0.2: U2.3@18.42,28.3 U2.3@18.35,28.23 25.17,28.23 29.48,23.92 32.9,23.92 34.12,22.7 38.833,22.7 45.033,28.9 58.233,28.9 62.883,33.55 U8.36@64.75,33.55
DAC_DATA: J2.8 U2.5 U3.5 U8.34 | length 67
  TopLayer w0.2: U3.5@18.2,42.9 v1(20.5,42.9) ; U2.5@18.35,30.77 18.42,30.7 25.1,30.7 29.34,26.46 32.9,26.46 34.06,25.3 40.233,25.3 44.633,29.7 57.833,29.7 62.683,34.55 U8.34@64.75,34.55
  BottomLayer w0.2: v1(20.5,30.7) v1(20.5,42.9)
DAC_LDAC: J2.7 U2.8 U3.8 U8.33 | length 73.2
  TopLayer w0.2: v1(13.4,34.7) 13.4,33.36 U2.8@13.45,33.31 ; v1(13.4,46.8) 13.4,45.46 U3.8@13.45,45.41 ; v1(18.3,34.7) 22.4,34.7 29.5,27.6 33.6,27.6 34.74,26.46 40.793,26.46 44.433,30.1 57.6,30.1 62.55,35.05 U8.33@64.75,35.05
  BottomLayer w0.2: v1(13.4,46.8) v1(13.4,34.7) v1(18.3,34.7)
DEVSEL#: P1.B37 U9.9 | length 14
  TopLayer w0.2: P1.B37@79.832,-0.381 79.832,4.499 80.1,4.767 80.1,5.5 79.925,5.675 U9.9@79.925,10.7
  TopLayer w0.5: 79.832,-3.131 P1.B37@79.832,-0.381
DIGITAL_D0: CN3.18 J1.18 U8.206 | length 80.8
  TopLayer w0.2: CN3.18@3.13,72.59 4.34,73.8 9.88,73.8 10.24,74.16 J1.18@16.5,74.16 17.74,75.4 19.9,75.4 21.1,74.2 21.1,72.7 33.226,60.574 58.426,60.574 62.25,56.75 62.25,54.831 63.107,53.974 64.874,53.974 65.15,54.25 65.15,55.317 65.983,56.15 67.031,56.15 67.85,55.331 U8.206@67.85,53.15
DIGITAL_D1: CN3.17 J1.17 U8.207 | length 76.5
  TopLayer w0.2: CN3.17@5.67,72.59 9.79,72.59 10.2,73 17.2,73 18.36,74.16 20.24,74.16 20.675,73.725 20.675,72.525 33.1,60.1 58.281,60.1 61.85,56.531 61.85,54.631 62.907,53.574 65.074,53.574 65.6,54.1 65.6,55.2 66.1,55.7 66.9,55.7 67.35,55.25 U8.207@67.35,53.15
DIGITAL_D2: CN3.16 J1.16 U8.208 | length 74.3
  TopLayer w0.2: CN3.16@3.13,70.05 4.38,71.3 9.86,71.3 10.18,71.62 16.72,71.62 18.1,73 19.563,73 29.132,63.431 29.15,63.431 32.881,59.7 58.081,59.7 61.425,56.356 61.425,54.475 62.75,53.15 U8.208@66.85,53.15
DIGITAL_D3: CN3.15 J1.15 U8.3 | length 68.7
  TopLayer w0.2: CN3.15@5.67,70.05 10.05,70.05 10.2,70.2 17.033,70.2 18.453,71.62 20.361,71.62 32.707,59.274 53.607,59.274 62.831,50.05 U8.3@64.75,50.05
DIGITAL_D4: CN3.14 J1.14 U8.4 | length 71.5
  TopLayer w0.2: CN3.14@3.13,67.51 4.32,68.7 9.84,68.7 10.22,69.08 16.98,69.08 18.3,70.4 20.981,70.4 28.35,63.031 32.507,58.874 53.408,58.874 62.732,49.55 U8.4@64.75,49.55
DIGITAL_D5: CN3.13 J1.13 U8.5 | length 68
  TopLayer w0.2: CN3.13@5.67,67.51 9.91,67.51 10.2,67.8 17.3,67.8 18.58,69.08 21.701,69.08 27.95,62.831 32.307,58.474 53.207,58.474 62.631,49.05 U8.5@64.75,49.05
DIGITAL_D6: CN3.12 J1.12 U8.6 | length 70.8
  TopLayer w0.2: CN3.12@3.13,64.97 4.36,66.2 9.82,66.2 10.16,66.54 16.94,66.54 18.3,67.9 22.281,67.9 27.55,62.631 32.107,58.074 53.017,58.074 62.541,48.55 U8.6@64.75,48.55
DIGITAL_D7: CN3.11 J1.11 U8.8 | length 67.6
  TopLayer w0.2: CN3.11@5.67,64.97 9.87,64.97 10.2,65.3 17.3,65.3 18.54,66.54 23.041,66.54 27.15,62.431 31.907,57.674 52.807,57.674 62.381,48.1 63.2,48.1 63.75,47.55 U8.8@64.75,47.55
DIGITAL_D8: CN3.10 J1.10 U8.10 | length 70.5
  TopLayer w0.2: CN3.10@3.13,62.43 4.3,63.6 9.8,63.6 10.2,64 J1.10@16.5,64 ; J1.10@16.5,63.9 16.9,63.9 18.2,65.2 23.781,65.2 31.707,57.274 52.607,57.274 63.331,46.55 U8.10@64.75,46.55
DIGITAL_D9: CN3.9 J1.9 U8.11 | length 67.2
  TopLayer w0.2: CN3.9@5.67,62.43 9.93,62.43 10.2,62.7 17.2,62.7 18.5,64 24.381,64 31.581,56.8 52.481,56.8 63.231,46.05 U8.11@64.75,46.05
DIGITAL_D10: CN3.8 J1.8 U8.12 | length 69.9
  TopLayer w0.2: CN3.8@3.13,59.89 4.24,61 9.78,61 10.24,61.46 16.86,61.46 18.1,62.7 25.081,62.7 31.407,56.374 52.307,56.374 63.131,45.55 U8.12@64.75,45.55
DIGITAL_D11: CN3.7 J1.7 U8.13 | length 66.5
  TopLayer w0.2: CN3.7@5.67,59.89 9.89,59.89 10.2,60.2 17.2,60.2 18.46,61.46 25.721,61.46 31.207,55.974 52.107,55.974 63.031,45.05 U8.13@64.75,45.05
DIGITAL_D12: CN3.6 J1.6 U8.14 | length 69.3
  TopLayer w0.2: CN3.6@3.13,57.35 4.28,58.5 9.76,58.5 10.18,58.92 17.02,58.92 18.3,60.2 26.381,60.2 31.007,55.574 51.907,55.574 62.931,44.55 U8.14@64.75,44.55
DIGITAL_D13: CN3.5 J1.5 U8.15 | length 65.9
  TopLayer w0.2: CN3.5@5.67,57.35 9.85,57.35 10.2,57.7 17.4,57.7 18.62,58.92 27.061,58.92 30.807,55.174 51.707,55.174 62.831,44.05 U8.15@64.75,44.05
DIGITAL_D14: CN3.4 J1.4 U8.30 | length 77.9
  TopLayer w0.2: CN3.4@3.13,54.81 4.32,56 9.84,56 10.22,56.38 J1.4@16.5,56.38 ; J1.4@16.6,56.3 17.2,56.3 18.6,57.7 27.681,57.7 30.607,54.774 51.541,54.774 59.3,47.015 v1(59.3,46.6) ; v1@61.35,36.55 U8.30@64.75,36.55
  BottomLayer w0.2: v1(59.3,46.6) 60,46.6 62.5,44.1 62.5,40.6 61.3,39.4 v1(61.3,36.6) v1@61.2,36.7
DIGITAL_D15: CN3.3 J1.3 U8.31 | length 76.1
  TopLayer w0.2: CN3.3@5.67,54.81 9.91,54.81 10.2,55.1 17.76,55.1 J1.3@19.04,56.38 19.046,56.374 19.572,56.9 27.881,56.9 30.407,54.374 51.376,54.374 58.6,47.15 v1(58.6,46) ; v1(61.3,35.7) 61.65,36.05 U8.31@64.75,36.05
  BottomLayer w0.2: v1(58.6,46) 58.726,45.874 60.107,45.874 62.1,43.881 62.1,40.8 60.6,39.3 60.6,36.3 61.2,35.7 v1(61.3,35.7)
FLASH_ASDI: U8.117 U13.5 | length 20
  TopLayer w0.2: U8.117@94.45,31.55 96.531,31.55 97.281,30.8 103.533,30.8 106.833,34.1 110.5,34.1 111.205,33.395 U13.5@111.205,32.15
FLASH_DATA: U8.115 U13.2 | length 16.5
  TopLayer w0.2: U8.115@94.45,30.55 96.4,30.55 97.05,29.9 108,29.9 108.665,29.235 U13.2@108.665,27.45
FLASH_DCLK: U8.116 U13.6 | length 18.6
  TopLayer w0.2: U8.116@94.45,31.05 96.465,31.05 97.141,30.374 103.707,30.374 107.033,33.7 109.7,33.7 109.935,33.465 U13.6@109.935,32.15
FLASH_NCS: U8.114 U13.1 | length 14.9
  TopLayer w0.2: U8.114@94.45,30.05 96.331,30.05 96.881,29.5 106.9,29.5 107.395,29.005 U13.1@107.395,27.45
FPGA_RESET: C33.2 R46.2 S5.1 S5.2 U8.118 | length 35.7
  TopLayer w0.2: U8.118@94.45,32.05 96.631,32.05 97.481,31.2 103.333,31.2 106.633,34.5 111.4,34.5 112.784,33.116 112.784,30.9 116.1,30.9 116.7,30.3 S5.1@116.7,28.1 S5.2@123.2,28.1
FRAME#: P1.A34 U9.6 | length 14.6
  TopLayer w0.2: v1(76.7,5) 76.7,8.1 77.975,9.375 U9.6@77.975,10.7
  BottomLayer w0.2: P1.A34@76.022,-0.381 76.022,4.322 v1(76.7,5)
  BottomLayer w0.5: 76.022,-3.131 P1.A34@76.022,-0.381

## Text inside footprints (layer, text, board x,y; h text height)
LED5: TopOverlay "K" at 114.6,63.2 h0.8; TopOverlay "A" at 114.3,70.8 h0.8
LED6: TopOverlay "K" at 117.5,63.2 h0.8; TopOverlay "A" at 117.1,70.8 h0.8
LED7: TopOverlay "K" at 120.3,63.2 h0.8; TopOverlay "A" at 120,70.8 h0.8
LED8: TopOverlay "K" at 123.1,63.2 h0.8; TopOverlay "A" at 122.8,70.8 h0.8
LED9: TopOverlay "K" at 125.9,63.2 h0.8; TopOverlay "A" at 125.4,70.8 h0.8
LED10: TopOverlay "K" at 132,71.4 h0.8; TopOverlay "A" at 132.1,63.7 h0.8
LED11: TopOverlay "K" at 134.7,71.4 h0.8; TopOverlay "A" at 134.9,63.7 h0.8
LED12: TopOverlay "K" at 152.6,13.8 h0.8; TopOverlay "A" at 152.5,19 h0.8
P1: TopOverlay "B14" at 49.987,3.556 h1.22; TopOverlay "B52" at 98.247,3.556 h1.22; TopOverlay "B62" at 110.312,3.556 h1.22; TopOverlay "B49" at 92.4,3.5 h1.22; TopOverlay "B11" at 44.907,3.556 h1.22; TopOverlay "B1" at 34.2,2.9 h1.22; BottomOverlay "A49" at 95.707,3.556 h1.22; BottomOverlay "A11" at 47.447,3.556 h1.22; BottomOverlay "A1" at 34.747,3.556 h1.22; BottomOverlay "A14" at 52.527,3.556 h1.22; BottomOverlay "A52" at 101.422,3.556 h1.22; BottomOverlay "A62" at 113.487,3.556 h1.22